# Altium PCB PCB1.PcbDoc
Units mil, origin at the board's own origin, x right, y up, seen from the top; angles counter-clockwise.
Board outline 5000 x 1000 mil, 2 copper layers (Top Layer, Bottom Layer), stack 25.4 mil thick; 53 components, 42 nets, 176 pads, 21 vias.
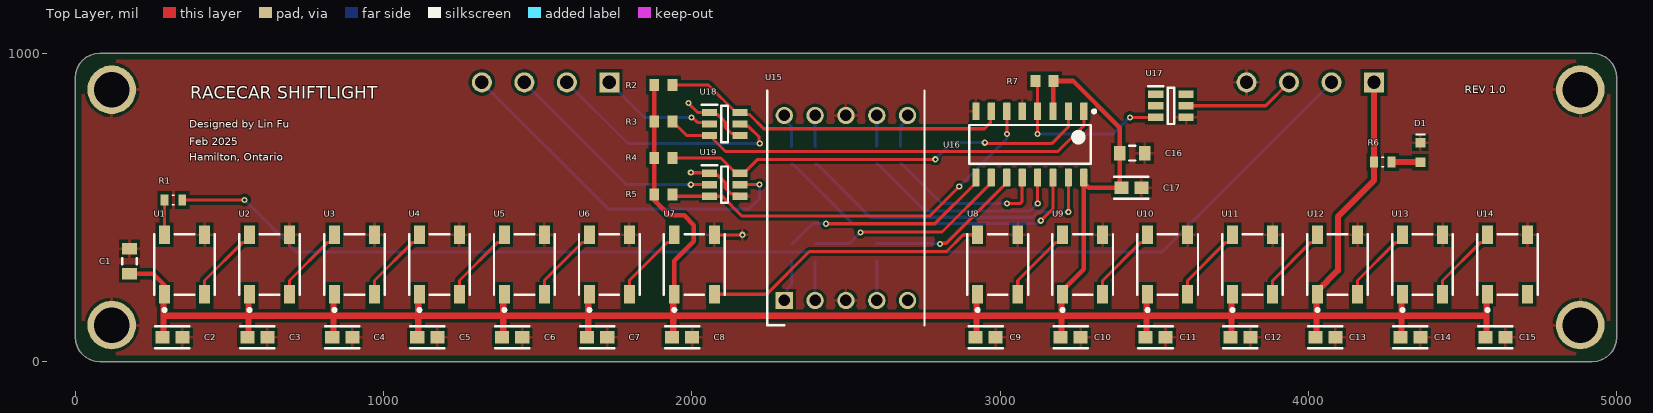
[diagram p0: Top Layer view]
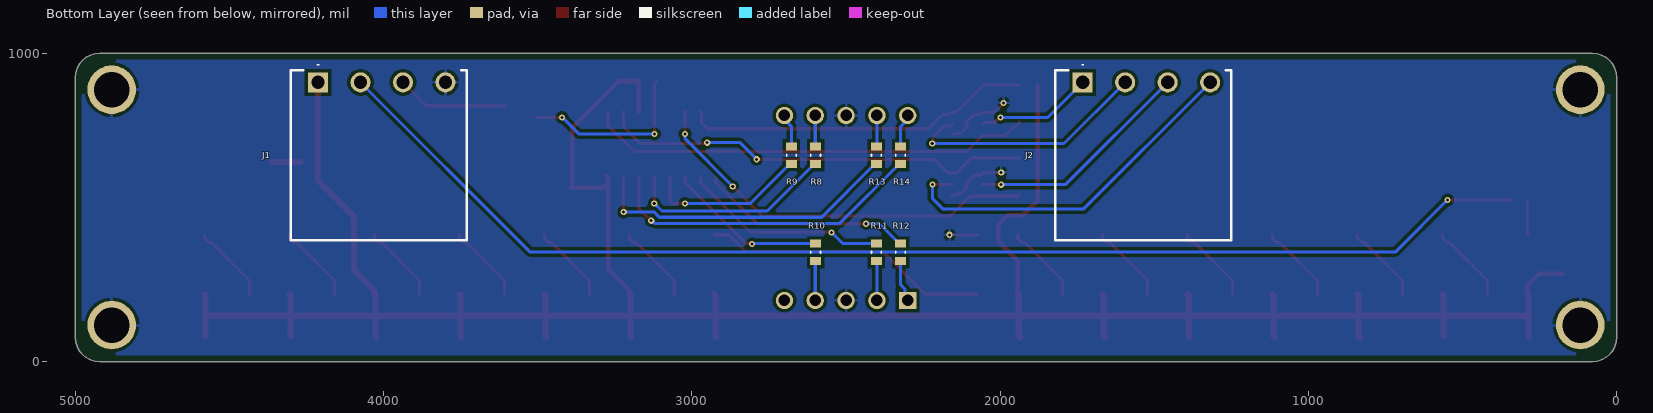
[diagram p1: Bottom Layer view, seen from below]
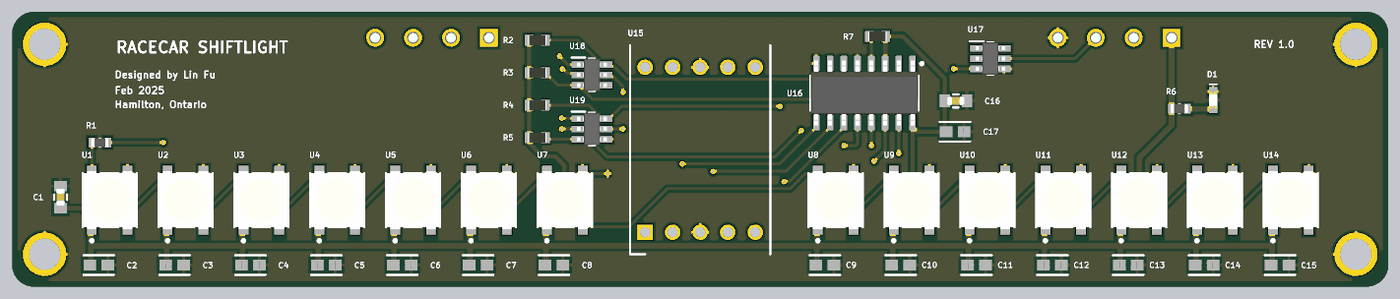
[diagram p2: 3D render of the assembled board from above, using the file's embedded part models]
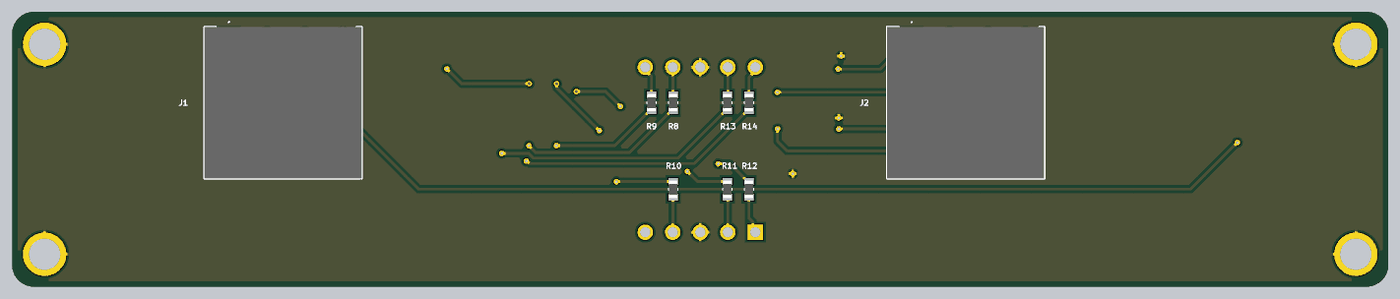
[diagram p3: 3D render of the assembled board from below, using the file's embedded part models]

## Layer stack, top to bottom
Top Solder: solder mask 0.4, Solder Resist, Dk 3.5
Top Layer: signal copper 1.4
Dielectric 1: dielectric 22.6, FR-4, Dk 4.8
Bottom Layer: signal copper 1.4
Bottom Solder: solder mask 0.4, Solder Resist, Dk 3.5

## Board outline
0,78.74 1.51,63.38 5.99,48.61 13.27,34.99 23.06,23.06 34.99,13.27 48.61,5.99 63.38,1.51 78.74,0 4921.26,0 4936.62,1.51 4951.39,5.99 4965.01,13.27 4976.94,23.06 4986.73,34.99 4994.01,48.61 4998.49,63.38 5000,78.74 5000,921.26 4998.49,936.62 4994.01,951.39 4986.73,965.01 4976.94,976.94 4965.01,986.73 4951.39,994.01 4936.62,998.49 4921.26,1000 78.74,1000 63.38,998.49 48.61,994.01 34.99,986.73 23.06,976.94 13.27,965.01 5.99,951.39 1.51,936.62 0,921.26

## Design rules (kind name [scope] priority, off if disabled: settings)
BoardOutlineClearance [All] p1: gap=20 ignorepadtopadclearanceinfootprint=FALSE except(0: Arc-SplitContinuation Track-SplitContinuation SMDPad-SplitContinuation THPad-SplitContinuation Via-SplitContinuation Fill-SplitContinuation Poly-SplitContinuation Region-SplitContinuation Text-SplitContinuation)
Clearance [All] p1: gap=10 ignorepadtopadclearanceinfootprint=FALSE
MinimumSolderMaskSliver [All] p1: minsoldermaskwidth=5
PolygonConnect [All] p1: connectstyle=Relief reliefconductorwidth=10 reliefentries=4 polygonreliefangle="90 Angle" airgapwidth=10
RoutingVias [All] p1: holewidth=10 width=20 viastyle="Through Hole" minholewidth=10 minwidth=20 maxholewidth=28 maxwidth=50
SilkToSolderMaskClearance [IsPad] p1: minsilkscreentomaskgap=5 clearancetoexposedcopper=TRUE
SolderMaskExpansion [All] p1: expansion=4 istentingtop=FALSE
SupplyNets "Schematic Supply Nets_1" [InNet('5V')] p1: voltage=0.000
SupplyNets "Schematic Supply Nets_2" [InNet('GND')] p2: voltage=0.000
Width [All] p1: maxlimit=20 minlimit=10 preferedwidth=10
28 further rules are at their usual default settings.

## Classes and differential pairs
component class ws2812b: C1 C2 C3 C4 C5 C6 C7 C8 C9 C10 C11 C12 C13 C14 C15 R1 U1 U2 U4 U5 U6 U7 U8 U9 U10 U11 U12 U13 U14
component class connectors_and_mosfets: J2 U17 U18 U19
component class 7_seg_display: C16 C17 D1 R2 R3 R4 R5 R6 R7 R8 R9 R10 R11 R12 R13 R14 U15 U16

## Components (designator, comment, footprint, x,y, rotation, side; value= is the part's Value field where it differs from the comment)
C1 "1uF" FP-CGA3E-0_3-0_1-IPC_A 175.9,325.74 r90 top
C2 "100nF" FP-CL10-IPC_A 314.96,78.74 r0 top
C3 "100nF" FP-CL10-IPC_A 590.55,78.74 r0 top
C4 "100nF" FP-CL10-IPC_A 866.14,78.74 r0 top
C5 "100nF" FP-CL10-IPC_A 1141.73,78.74 r0 top
C6 "100nF" FP-CL10-IPC_A 1417.32,78.74 r0 top
C7 "100nF" FP-CL10-IPC_A 1692.91,78.74 r0 top
C8 "100nF" FP-CL10-IPC_A 1968.5,78.74 r0 top
C9 "100nF" FP-CL10-IPC_A 2952.76,78.74 r0 top
C10 "100nF" FP-CL10-IPC_A 3228.35,78.74 r0 top
C11 "100nF" FP-CL10-IPC_A 3503.94,78.74 r0 top
C12 "100nF" FP-CL10-IPC_A 3779.53,78.74 r0 top
C13 "100nF" FP-CL10-IPC_A 4055.12,78.74 r0 top
C14 "100nF" FP-CL10-IPC_A 4330.71,78.74 r0 top
C15 "100nF" FP-CL10-IPC_A 4606.3,78.74 r0 top
C16 "1uF" FP-CGA3E-0_3-0_1-IPC_A 3428.49,675.9 r0 top
C17 "100nF" FP-CL10-IPC_A 3425.82,563.85 r0 top
D1 "150060VS75000" WL-SMCW_0603_150060xx75000 4363.32,678.49 r270 top
J1 "284414-4" 2844144 4212.6,905.51 r180 bottom
J2 "284414-4" 2844144 1732.28,905.51 r180 bottom
R1 "ERJ-PB3B3300V" RES_ERJ-PB3B3300V 318.45,524.23 r0 top value=330
R2 "Resistor 10k +/-1% 0603 100 mW" RESC1608X55X25ML10T15 1907.93,896.76 r180 top value=10k
R3 "Resistor 10k +/-1% 0603 100 mW" RESC1608X55X25ML10T15 1907.93,778.65 r180 top value=10k
R4 "Resistor 10k +/-1% 0603 100 mW" RESC1608X55X25ML10T15 1907.93,660.54 r180 top value=10k
R5 "Resistor 10k +/-1% 0603 100 mW" RESC1608X55X25ML10T15 1907.93,542.43 r180 top value=10k
R6 "ERJ-PB3B3300V" RES_ERJ-PB3B3300V 4240.84,647.39 r180 top value=330
R7 "Resistor 10k +/-1% 0603 100 mW" RESC1608X55X25ML10T15 3143.88,909.98 r0 top value=10k
R8 "ERJ-PB3B3300V" RES_ERJ-PB3B3300V 2598.43,669.29 r270 bottom value=330
R9 "ERJ-PB3B3300V" RES_ERJ-PB3B3300V 2677.17,669.29 r270 bottom value=330
R10 "ERJ-PB3B3300V" RES_ERJ-PB3B3300V 2598.43,354.33 r90 bottom value=330
R11 "ERJ-PB3B3300V" RES_ERJ-PB3B3300V 2401.57,354.33 r90 bottom value=330
R12 "ERJ-PB3B3300V" RES_ERJ-PB3B3300V 2322.83,354.33 r90 bottom value=330
R13 "ERJ-PB3B3300V" RES_ERJ-PB3B3300V 2401.57,669.29 r270 bottom value=330
R14 "ERJ-PB3B3300V" RES_ERJ-PB3B3300V 2322.83,669.29 r90 bottom value=330
U1 "WS2812B" ADAI-WS2812B_V 354.33,314.96 r90 top
U2 "WS2812B" ADAI-WS2812B_V 629.92,314.96 r90 top
U3 "WS2812B" ADAI-WS2812B_V 905.51,314.96 r90 top
U4 "WS2812B" ADAI-WS2812B_V 1181.1,314.96 r90 top
U5 "WS2812B" ADAI-WS2812B_V 1456.69,314.96 r90 top
U6 "WS2812B" ADAI-WS2812B_V 1732.28,314.96 r90 top
U7 "WS2812B" ADAI-WS2812B_V 2007.87,314.96 r90 top
U8 "WS2812B" ADAI-WS2812B_V 2992.13,314.96 r90 top
U9 "WS2812B" ADAI-WS2812B_V 3267.72,314.96 r90 top
U10 "WS2812B" ADAI-WS2812B_V 3543.31,314.96 r90 top
U11 "WS2812B" ADAI-WS2812B_V 3818.9,314.96 r90 top
U12 "WS2812B" ADAI-WS2812B_V 4094.49,314.96 r90 top
U13 "WS2812B" ADAI-WS2812B_V 4370.08,314.96 r90 top
U14 "WS2812B" ADAI-WS2812B_V 4645.67,314.96 r90 top
U15 "SC56-11SURKWA" DIPS1524W75P254L1270H825Q10N 2299.78,198.28 r90 top
U16 "CD74HC4511M96" D0016A_N 3096.46,704.33 r270 top
U17 "SZNUD3124DMT1G" SOT95P275X110-6N 3554.12,829.74 r0 top
U18 "SZNUD3124DMT1G" SOT95P275X110-6N 2106.51,770.54 r0 top
U19 "SZNUD3124DMT1G" SOT95P275X110-6N 2106.51,573.69 r0 top

## Footprints (in the part's own frame and the unit in brackets; to place one, negate y for a bottom-side part, rotate by r counter-clockwise, add the part's x,y. Pads: shape width x height; smd on the part's side, far side on the other; paste and mask are expansions set on the pad)
2844144 [mm]
  rect 1.65x1.65 hole 1.1: 1(0,0)
  round 1.65 hole 1.1: 2(3.5,0) 3(7,0) 4(10.5,0)
  silkscreen extent -2.25,-13 12.25,1.5, body extent -2.25,-13 12.25,1, height 8.45
ADAI-WS2812B_V [mm] "SMD, 4-Leads, Body 5x5mm, Pitch 3.3mm"
  rect 1.5x0.9 smd: 1(-2.45,1.65) 2(-2.45,-1.65) 3(2.45,-1.65) 4(2.45,1.65)
  silkscreen extent -3.87,-2.5 2.5,2.5, body extent -2.7,-2.5 2.7,2.5, height 1.69
D0016A_N [mm] "SOIC, 16-Leads, Body 10x4mm, Pitch 1.27mm, IPC Medium Density"
  rrect17% 1.45x0.6 smd: 1(-2.725,4.445) 2(-2.725,3.175) 3(-2.725,1.905) 4(-2.725,0.635) 5(-2.725,-0.635) 6(-2.725,-1.905) 7(-2.725,-3.175) 8(-2.725,-4.445) 9(2.725,-4.445) 10(2.725,-3.175) 11(2.725,-1.905) 12(2.725,-0.635) 13(2.725,0.635) 14(2.725,1.905) 15(2.725,3.175) 16(2.725,4.445)
  silkscreen extent -2.85,-5 1.6,5.42, body extent -3,-4.95 3,4.95, height 1.59
DIPS1524W75P254L1270H825Q10N [mm]
  rect 1.425x1.425 hole 0.95: 1(0,0)
  round 1.425 hole 0.95: 2(0,-2.54) 3(0,-5.08) 4(0,-7.62) 5(0,-10.16) 6(15.24,-10.16) 7(15.24,-7.62) 8(15.24,-5.08) 9(15.24,-2.54) 10(15.24,0)
  silkscreen extent -2.03,-11.56 17.27,1.4
FP-CGA3E-0_3-0_1-IPC_A [mm]
  rect 0.956x1.206 smd paste+0 mask+0: 1(-1.025,0) 2(1.025,0)
  silkscreen extent -0.25,-0.6 0.25,0.6, body extent -2,-1.1 2,1.1, height 0.25
FP-CL10-IPC_A [mil]
  rect 45.6x39.85 smd paste+0 mask+0: 1(-32.56,0) 2(32.56,0)
  silkscreen extent -55,-36 55,36, body extent -75,-40 75,40, height 10
RES_ERJ-PB3B3300V [mm]
  rect 0.65x0.9 smd: 1(-0.725,0) 2(0.725,0)
  silkscreen extent -0.08,-0.4 0.08,0.4, body extent -0.8,-0.4 0.8,0.4, height 0.45
RESC1608X55X25ML10T15 [mm] "Chip Resistor, 2-Leads, Body 1.70x0.90mm, IPC Low Density"
  rect 0.8x1 smd: 1(-0.75,0) 2(0.75,0)
  body extent -0.85,-0.45 0.85,0.45, height 0.55
SOT95P275X110-6N [mm]
  rect 1.25x0.6 smd: 1(-1.25,0.95) 2(-1.25,0) 3(-1.25,-0.95) 4(1.25,-0.95) 5(1.25,0) 6(1.25,0.95)
  silkscreen extent -1.88,-1.5 0.28,1.6, body extent -1.38,-1.5 1.38,1.5, height 1.1
WL-SMCW_0603_150060xx75000 [mm] "SMD Mono-color Chip LED, body 1.60 x 0.80 mm"
  rect 0.8x0.8 smd: 1(-0.8,0) 2(0.8,0)
  silkscreen extent -1.55,-0.4 -1.4,0.4, body extent -0.8,-0.4 0.8,0.4, height 0.7

## Part data
C1 C16: library part CMP-08246-002161-1, "Cap Ceramic 1uF 16V X7R 10% Pad SMD 0603 +125°C Automotive T/R", Case Code (Imperial)=0603, Case Code (Metric)=1608, Dielectric=X7R, Max Operating Temperature=125°C, Min Operating Temperature=-55°C, Package Quantity=4000, Ratings=AEC-Q200, Tolerance=10%, Voltage Rating=16V, Capacitance=1uF, Case/Package=0603, Height=0.8mm, Lead Free="Lead Free", Length=0.063inch, Mount="Surface Mount", Packaging="Tape and Reel", REACH SVHC="No SVHC", Termination=SMD/SMT, Thickness=0.035inch, Voltage Rating (DC)=16V, Weight=7.1E-05oz, Width=0.8mm
C2 C3 C4 C5 C6 C7 C8 C9 C10 C11 C12 C13 C14 C15 C17: library part CMP-13271-002683-1, "Cap Ceramic 100nF 16V X7R ±10% Pad SMD 0603 +125°C T/R", Case Code (Imperial)=0603, Case Code (Metric)=1608, Max Operating Temperature=125°C, Min Operating Temperature=-55°C, Ratings=AEC-Q200, Tolerance=10%, Voltage Rating=16V, Capacitance=100nF, Case/Package=0603, Features="Soft Termination", Length=0.063inch, Mount="Surface Mount", Packaging="Tape and Reel", Thickness=0.035inch, Width=0.031inch
D1: library part CMP-1426-00006-7, "WURTH ELEKTRONIK - 150060VS75000 - LED, Green, SMD, 0603, 30 mA, 2 V, 570 nm", Case Code (Imperial)=0603, Case Code (Metric)=1608, Color=Green, Forward Current=100mA, Forward Voltage=2V, Max Junction Temperature (Tj)=95°C, Max Operating Temperature=85°C, Max Reverse Voltage (DC)=5V, Min Operating Temperature=-40°C, Power Dissipation=72mW, Test Current=20mA, Case/Package=0603, Dominant Wavelength=570nm, Height=700µm, Length=1.6mm, Lens Style="Clear, Rectangular", Luminous Intensity=40mcd, Mount="Surface Mount", Number of Pins=2, Packaging="Tape and Reel", Peak Wavelength=572nm, REACH SVHC=Unknown, Reverse Voltage=5V, RoHS=Compliant, Viewing Angle=140°, Wavelength=570nm, Width=800µm
J1 J2: "Connector", Manufacturer_Name="TE Connectivity", Mouser Part Number=571-284414-4, Datasheet Link=https://www.te.com/commerce/DocumentDelivery/DDEController?Action=srchrtrv&DocNm=1-1773458-1_EURO_STYLE_QRG&DocType=Data%20Sheet&DocLang=English&PartCntxt=284414-4&DocFormat=pdf, Height=8.35mm, Manufacturer_Part_Number=284414-4, Mouser Price/Stock=https://www.mouser.co.uk/ProductDetail/TE-Connectivity-AMP/284414-4?qs=pW%2FyRk%2FT1EFQM4dD%252BIL6sA%3D%3D
  J1: ComponentLink1Description=digikey, ComponentLink1URL=https://www.digikey.ca/en/products/detail/te-connectivity-amp-connectors/284414-4/1150171
R1 R6 R8 R9 R10 R11 R12 R13 R14: library part CMP-009-00177-1, "Series/Type: High Precision Thick Film Chip Resistors , Power Rating (W): 0.2, Chip Size (LxW(EIA)) (mm): 1.6 x 0.8 (EIA:0603), Resistance Values (鈩", Case/Package="603-2 Panasonic", Availability="In Stock", Check_prices=https://www.snapeda.com/parts/ERJ-PB3B3300V/Panasonic/view-part/?ref=eda, Component Type=Standard, Design Item ID=ERJ-PB3B3300V, MF=Panasonic, MP=ERJ-PB3B3300V, Pins=2, Price=None, Purchase-URL=https://pricing.snapeda.com/search/part/ERJ-PB3B3300V/?ref=eda, SnapEDA_Link=https://www.snapeda.com/parts/ERJ-PB3B3300V/Panasonic/view-part/?ref=snap, Source=ERJ-PB3B3300V.SchLib
  R8: ComponentLink1Description=Digikey, ComponentLink1URL=https://www.digikey.ca/en/products/detail/panasonic-electronic-components/ERJ-PB3B3300V/6212698
R2 R3 R4 R5 R7: library part CMP-009-00017-5, "Chip Resistor, 10 KOhm, +/- 1%, 01 W, -55 to 155 degC, 0603 (1608 Metric)", Case/Package=0603, Max Operating Temperature=155°C, Min Operating Temperature=-55°C, Power=100mW, Tolerance=1%, Voltage Rating=50V, Mounting Technology=SM, Pins=2, RoHS Compliant=True
U1 U2 U3 U4 U5 U6 U7 U8 U9 U10 U11 U12 U13 U14: library part CMP-007-00035-2, "Intelligent Control LED Integrated Light Source, 3.5 to 5.3 V, -25 to 80 degC, 4-Pin SMD, RoHS, Bulk", Manufacturer="Adafruit Industries", Package Description="4-Pin Surface Mount Device, Body 5 x 5 mm, Pitch 3.3 mm", Case/Package=WS2812B, Datasheet URL=https://cdn-shop.adafruit.com/datasheets/WS2812B.pdf, Datasheet Version=May-13, Manufacturer URL=https://www.adafruit.com/, Mounting Technology=SM, Package Reference=WS2812B, RoHS Compliant=False
U15: "Display", Manufacturer_Name=Kingbright, Mouser Part Number=604-SC56-11SURKWA, Arrow Part Number=SC56-11SURKWA, Arrow Price/Stock=https://www.arrow.com/en/products/sc56-11surkwa/kingbright?region=europe, Datasheet Link=https://www.kingbrightusa.com/images/catalog/SPEC/SC56-11SURKWA.pdf, Height=8.25mm, Manufacturer_Part_Number=SC56-11SURKWA, Mouser Price/Stock=https://www.mouser.co.uk/ProductDetail/Kingbright/SC56-11SURKWA?qs=FRBiz4Wv1YPfPJAshkDmnw%3D%3D
U16: library part CMP-0388-00023-2, "High Speed CMOS Logic BCD-to-7-Segment Latch / Decoder / Driver, 2 to 6 V, -55 to 125 degC, 16-pin SOIC (D16), Green (RoHS & no Sb/Br)", Manufacturer="Texas Instruments", Rating=Catalog, Code_JEDEC=MS-012, ComponentLink1Description="Manufacturer URL", ComponentLink1URL=http://www.ti.com/, ComponentLink2Description=Datasheet, ComponentLink2URL=http://www.ti.com/general/docs/lit/getliterature.tsp?genericPartNumber=CD74HC4511&fileType=pdf, ComponentLink3Description="Package Specification", ComponentLink3URL=http://www.ti.com/litv/pdf/mpds178g, DatasheetVersion=SCHS279D, Eco-Plan="Green (RoHS & no Sb/Br)", Mounting Technology="Surface Mount", PackageDescription="16-Pin Plastic Small Outline, Body 9.90 x 3.90 mm, Pitch 1.27 mm", PackageReference=D0016A, PackageVersion=4040047-6/M, PartNumber=CD74HC4511M96, SubFamily="Discrete Segment LED Driver", Vin(Max)(V)=6, Vin(Min)(V)=2
U17 U18 U19: "Integrated Circuit", Manufacturer_Name=onsemi, Mouser Part Number=863-SZNUD3124DMT1G, Arrow Part Number=SZNUD3124DMT1G, Arrow Price/Stock=https://www.arrow.com/en/products/sznud3124dmt1g/on-semiconductor?region=nac, Datasheet Link=https://componentsearchengine.com/Datasheets/2/SZNUD3124DMT1G.pdf, Height=1.1mm, Manufacturer_Part_Number=SZNUD3124DMT1G, Mouser Price/Stock=https://www.mouser.co.uk/ProductDetail/onsemi/SZNUD3124DMT1G?qs=uarJZ6H%252BeNp%2Fh61aNCid3w%3D%3D

## Free pads (board coordinates)
  round 157.48 hole 114.17: 1(118.11,118.11) 1(118.11,881.89) 1(4881.89,118.11) 1(4881.89,881.89)

## Via types
v1: diameter 20, hole 10, Top Layer to Bottom Layer, 21 vias

## Nets (pads, with @x,y where several pads share a name; then routed paths per layer and width w, separated by ;. In a path a pad name is that pad's centre, name@x,y a point inside that pad or via, vN(x,y) a via of type N, cw(c..) or ccw(c..) an arc to the next point about the centre after c; other vN are vias at no path point)
5V: C1.1 C2.1 C3.1 C4.1 C5.1 C6.1 C7.1 C8.1 C9.1 C10.1 C11.1 C12.1 C13.1 C14.1 C15.1 C16.1 C17.1 J1.1 R2.2 R3.2 R4.2 R5.2 R6.2 R7.2 U1.1 U2.1 U3.1 U4.1 U5.1 U6.1 U7.1 U8.1 U9.1 U10.1 U11.1 U12.1 U13.1 U14.1 U16.3 U16.16 | length 9133.1
  Top Layer w15: C1.1 252.02,285.39 289.37,248.03 U1.1 ; C2.1 285.89,82.22 C2.1@289.37,85.71 ; C3.1@560.87,78.74 C3.1 561.48,82.22 C3.1@564.96,85.71 ; U2.1@564.96,206.69 U2.1 ; R2.2 1878.4,895.97 R3.2 R4.2 R5.2 1878.4,522.75 1927.02,474.13 1974.79,474.13 2006.16,442.76 2006.16,390 1942.91,326.75 U7.1 ; U16.3 3172.43,812.59 3172.43,909 R7.2 3237.02,909.98 3388.14,758.86 C16.1 3388.14,568.98 C17.1 3287.92,563.85 U16.16@3271.46,580.32 ; U9.1@3203.25,230.81 3271.46,299.02 U16.16@3271.46,580.32 ; U16.16@3275.77,602.14 3271.46,597.83 U16.16 U16.16@3271.46,580.32 ; C14.1 4301.63,82.22 C14.1@4305.12,85.71 ; C15.1 4577.22,82.22 C15.1@4580.71,85.71
  Top Layer w20: C2.1@285.89,82.22 285.89,148.62 ; U1.1 285.89,215.02 285.89,148.62 ; C3.1@561.48,82.22 561.48,148.62 ; U2.1 561.48,215.02 561.48,148.62 ; C4.1 837.07,82.22 837.07,148.62 ; U3.1 837.07,215.02 837.07,148.62 ; C5.1 1112.66,82.22 1112.66,148.62 ; U4.1 1112.66,215.02 1112.66,148.62 ; C6.1 1388.25,82.22 1388.25,148.62 ; U5.1 1388.25,215.02 1388.25,148.62 ; C7.1 1663.84,82.22 1663.84,148.62 ; U6.1 1663.84,215.02 1663.84,148.62 ; C8.1 1939.43,82.22 1939.43,148.62 ; U7.1 1939.43,215.02 1939.43,148.62 ; C9.1 2923.68,82.22 2923.68,148.62 ; U8.1 2923.68,215.02 2923.68,148.62 ; C10.1 3199.27,82.22 3199.27,148.62 ; U9.1 3199.27,215.02 3199.27,148.62 ; C11.1 3474.86,82.22 3474.86,148.62 ; U10.1 3474.86,215.02 3474.86,148.62 ; C12.1 3750.45,82.22 3750.45,148.62 ; U11.1 3750.45,215.02 3750.45,148.62 ; C13.1 4026.04,82.22 4026.04,148.62 ; J1.1 4212.3,905.21 R6.2 4212.3,587.33 4095.42,470.45 4095.42,296.2 4029.53,230.31 U12.1 4026.04,215.02 4026.04,148.62 ; C14.1@4301.63,82.22 4301.63,148.62 ; U13.1 4301.63,215.02 4301.63,148.62 ; C15.1@4577.22,82.22 4577.22,148.62 ; U14.1 4577.22,215.02 4577.22,148.62 ; 285.89,148.62 561.48,148.62 ; 561.48,148.62 837.07,148.62 ; 837.07,148.62 1112.66,148.62 ; 1112.66,148.62 1388.25,148.62 ; 1388.25,148.62 1663.84,148.62 ; 1663.84,148.62 1939.43,148.62 ; 1939.43,148.62 2923.68,148.62 ; 2923.68,148.62 3199.27,148.62 ; 3199.27,148.62 3474.86,148.62 ; 3474.86,148.62 3750.45,148.62 ; 3750.45,148.62 4026.04,148.62 ; 4026.04,148.62 4301.63,148.62 ; 4301.63,148.62 4577.22,148.62
7_SEG_BRIGHTNESS_PWM: J1.3 U17.5 | length 365.1
  Top Layer w10: U17.5 3861.24,829.74 J1.3
a_out: R8.2 U16.13 | length 679
  Top Layer w10: U16.13 3121.72,596.78 3121.72,515.66 v1@3121.99,515.39
  Bottom Layer w10: R8.2 2603.35,640.75 2755.93,488.16 3096.99,488.16 v1(3121.99,513.16)
b_out: R9.2 U16.12 | length 527.5
  Top Layer w10: v1(3022.31,513.16) 3065.47,513.16 3071.46,519.15 U16.12
  Bottom Layer w10: R9.2 2682.09,640.75 2809.67,513.16 v1(3022.31,513.16)
BL_n: R7.1 U16.4 U17.3 | length 580
  Top Layer w10: R7.1 3121.46,902.87 U16.4 ; v1(3121.5,738.64) U16.4 ; v1(3420.88,792.13) 3420.98,792.24 3504.8,792.24 U17.3
  Bottom Layer w10: v1(3121.5,738.64) 3367.39,738.64 v1(3420.88,792.13)
c_out: R10.2 U16.11 | length 522.4
  Top Layer w10: v1(2804.4,381.81) 2806.31,383.72 2824.86,383.72 3021.46,580.32 U16.11
  Bottom Layer w10: R10.2 2598.96,382.34 2803.86,382.34 v1(2804.4,381.81)
D0_IN: J2.1 U18.2 | length 380.9
  Top Layer w10: v1(1998.94,791.84) 2001.65,791.84 2017.69,775.8 2052.03,775.8 U18.2
  Bottom Layer w10: J2.1 1845.95,791.84 v1(1998.94,791.84)
D1_IN: J2.2 U18.5 | length 809.8
  Top Layer w10: U18.5 2162.53,763.73 2182.76,763.73 2218.29,728.2 2218.29,709.1 v1(2220.2,707.19)
  Bottom Layer w10: J2.2 1792.81,707.19 v1(2220.2,707.19)
D2_IN: J2.3 U19.2 | length 742.9
  Top Layer w10: v1@1997.18,573.78 1997.23,573.74 2057.25,573.74 U19.2 U19.2@2053.86,577.12
  Bottom Layer w10: J2.3 1788.42,573.78 v1@1997.18,573.78
  other v1: 1996.57,573.78
D3_IN: J2.4 U19.5 | length 1193.4
  Top Layer w10: U19.5 2155.89,573.85 2218.73,573.85 v1@2218.9,574.02
  Bottom Layer w10: J2.4 1730.14,494.27 2184.72,494.27 2219.04,528.59 v1(2219.04,574.02)
d_out: R11.2 U16.10 | length 668.4
  Top Layer w10: v1(2546.66,418.84) 2547.92,420.1 2811.24,420.1 2971.46,580.32 U16.10
  Bottom Layer w10: R11.2 2510.69,382.87 v1(2546.66,418.84)
DIN: J1.2 R1.2 | length 4026.1
  Top Layer w10: R1.2 347.3,524.55 v1(548.83,524.55)
  Bottom Layer w10: v1(548.83,524.55) 718.3,355.08 3524.37,355.08 J1.2
DOUT_U7: U7.2 U8.4 | length 934.2
  Top Layer w10: U7.2 2242.69,218.5 2380.99,356.81 2826.23,356.81 2880.84,411.42 U8.4
e_out: R12.2 U16.9 | length 697.6
  Top Layer w10: v1(2434.8,447.06) 2788.2,447.06 2921.46,580.32 U16.9
  Bottom Layer w10: R12.2 2327.76,382.87 2392.55,447.66 2434.19,447.66 v1(2434.8,447.06)
f_out: R13.2 U16.15 | length 1010.2
  Top Layer w10: v1(3221.19,485) 3221.32,485.13 3221.32,596.92 U16.15
  Bottom Layer w10: R13.2 2406.5,640.75 2579.08,468.16 3105.27,468.16 3122.11,485 v1(3221.19,485)
g_out: R14.1 U16.14 | length 1049.2
  Top Layer w10: v1(3131.98,456.99) 3171.74,496.75 3171.74,596.77 U16.14
  Bottom Layer w10: R14.1 2327.76,640.75 2520.34,448.16 3120.45,448.16 3129.28,456.99 v1(3131.98,456.99)
GND: C1.2 C2.2 C3.2 C4.2 C5.2 C6.2 C7.2 C8.2 C9.2 C10.2 C11.2 C12.2 C13.2 C14.2 C15.2 C16.2 C17.2 D1.1 J1.4 pad.1 U1.3 U2.3 U3.3 U4.3 U5.3 U6.3 U7.3 U8.3 U9.3 U10.3 U11.3 U12.3 U13.3 U14.3 U15.3 U15.8 U16.5 U16.8 U17.4 U18.1 U18.4 U19.1 U19.4 | length 513.5
  Top Layer w10: v1(1988.59,839.1) 1988.59,838.39 2019.03,807.94 U18.1 2064.1,801.13 2084.33,801.13 2108.4,777.06 2108.4,760.23 2128.68,739.95 2148.91,739.95 U18.4 ; v1(1996.57,613.63) 1997.84,612.36 2056.02,612.36 2064.1,604.28 2084.33,604.28 2108.4,580.21 2108.4,563.38 2128.68,543.1 2148.91,543.1 U19.4 ; U7.3 2073.09,411.16 v1(2163.89,411.16)
NetD1_2: D1.2 R6.1 | length 94.1
  Top Layer w15: R6.1 R6.1@4269.58,647.19 ; D1.2@4363.13,647.19 D1.2
  Top Layer w20: R6.1@4269.58,647.19 D1.2@4363.13,647.19
NetR1_1: R1.1 U1.4 | length 124.8
  Top Layer w10: U1.4@289.37,423.23 U1.4 289.9,411.95 R1.1
NetR2_1: R2.1 U16.7 U18.6 | length 1132.2
  Top Layer w10: R2.1 2054.1,896.76 2142.92,807.94 U18.6 ; U18.6@2159.4,807.94 2165.91,801.43 2186.84,801.43 2233.04,755.23 2949.09,755.23 2968.27,774.41 2968.27,808.43 U16.7
NetR3_1: R3.1 U16.1 U18.3 | length 1457.7
  Top Layer w10: R3.1 1937.46,774.72 1948.21,763.97 1952.14,763.97 1982.98,733.13 U18.3 2109.16,681.27 3187.39,681.27 3271.46,765.34 U16.1
NetR4_1: R4.1 U16.2 U19.6 | length 1419.5
  Top Layer w10: R4.1 2093.47,660.54 2142.92,611.09 2168.51,611.09 2213.56,656.14 v1(2789.65,656.14) ; v1(2950.31,709.96) 2953.01,709.96 2956.01,706.96 3167.1,706.96 3221.46,761.32 U16.2
  Bottom Layer w10: v1(2789.65,656.14) 2843.47,709.96 v1(2950.31,709.96)
NetR5_1: R5.1 U16.6 U19.3 | length 1306.8
  Top Layer w10: R5.1 1943.61,536.28 U19.3 2098.09,536.28 2162.06,472.31 2771.68,472.31 v1(2867.48,568.11) ; U16.6@3021.09,811.25 U16.6 3021.6,811.47 3021.6,738.79 v1(3021.74,738.64)
  Bottom Layer w10: v1(2867.48,568.11) 3021.74,722.37 v1(3021.74,738.64)
NetU1_2: U1.2 U2.4 | length 258.6
  Top Layer w10: U1.2 419.29,263.03 543.15,386.89 552.24,386.89 564.96,399.61 U2.4
NetU2_2: U2.2 U3.4 | length 258.6
  Top Layer w10: U2.2 694.88,263.03 818.74,386.89 827.83,386.89 840.55,399.61 U3.4
NetU3_2: U3.2 U4.4 | length 258.6
  Top Layer w10: U3.2 970.47,263.03 1094.33,386.89 1103.43,386.89 1116.14,399.61 U4.4
NetU4_2: U4.2 U5.4 | length 258.6
  Top Layer w10: U4.2 1246.06,263.03 1369.92,386.89 1379.02,386.89 1391.73,399.61 U5.4
NetU5_2: U5.2 U6.4 | length 258.6
  Top Layer w10: U5.2 1521.65,263.03 1645.51,386.89 1654.61,386.89 1667.32,399.61 U6.4
NetU6_2: U6.2 U7.4 | length 258.6
  Top Layer w10: U6.2 1797.24,263.03 1921.1,386.89 1930.2,386.89 1942.91,399.61 U7.4
NetU8_2: U8.2 U9.4 | length 258.6
  Top Layer w10: U8.2 3057.09,263.03 3180.94,386.89 3190.04,386.89 3202.76,399.61 U9.4
NetU9_2: U9.2 U10.4 | length 258.6
  Top Layer w10: U9.2 3332.68,263.03 3456.54,386.89 3465.63,386.89 3478.35,399.61 U10.4
NetU10_2: U10.2 U11.4 | length 258.6
  Top Layer w10: U10.2 3608.27,263.03 3732.13,386.89 3741.22,386.89 3753.94,399.61 U11.4
NetU11_2: U11.2 U12.4 | length 258.6
  Top Layer w10: U11.2 3883.86,263.03 4007.72,386.89 4016.81,386.89 4029.53,399.61 U12.4
NetU12_2: U12.2 U13.4 | length 258.6
  Top Layer w10: U12.2 4159.45,263.03 4283.31,386.89 4292.4,386.89 4305.12,399.61 U13.4
NetU13_2: U13.2 U14.4 | length 258.6
  Top Layer w10: U13.2 4435.04,263.03 4558.9,386.89 4567.99,386.89 4580.71,399.61 U14.4
SEG_A: R8.1 U15.7 | length 101
  Bottom Layer w10: R8.1 2599.78,699.19 U15.7
SEG_B: R9.1 U15.6 | length 109.8
  Bottom Layer w10: R9.1 2677.17,763.19 2699.78,785.8 U15.6
SEG_C: R10.1 U15.4 | length 128.1
  Bottom Layer w10: R10.1 2599.78,324.43 U15.4
SEG_D: R11.1 U15.2 | length 128.3
  Bottom Layer w10: U15.2 2399.78,323.99 R11.1
SEG_E: R12.1 U15.1 | length 137.1
  Bottom Layer w10: U15.1 2308.92,207.42 2308.92,235.47 2322.83,249.38 R12.1
SEG_F: R13.1 U15.9 | length 101.2
  Bottom Layer w10: U15.9 2399.78,699.63 R13.1
SEG_G: R14.2 U15.10 | length 110
  Bottom Layer w10: U15.10 2299.78,785.8 2322.83,762.74 R14.2
pads on no net: U14.2 U15.5 U17.1 U17.2 U17.6

## Polygon pours and split planes (outlines as drawn)
GND on Top Layer "GND_TOP" (solid, remove dead copper, pour order 0): 0,78.74 1.51,63.38 5.99,48.61 13.27,34.99 23.06,23.06 34.99,13.27 48.61,5.99 63.38,1.51 78.74,0 4921.26,0 4936.62,1.51 4951.39,5.99 4965.01,13.27 4976.94,23.06 4986.73,34.99 4994.01,48.61 4998.49,63.38 5000,78.74 5000,921.26 4998.49,936.62 4994.01,951.39 4986.73,965.01 4976.94,976.94 4965.01,986.73 4951.39,994.01 4936.62,998.49 4921.26,1000 78.74,1000 63.38,998.49 48.61,994.01 34.99,986.73 23.06,976.94 13.27,965.01 5.99,951.39 1.51,936.62 0,921.26
GND on Bottom Layer "GND_BOTTOM" (solid, pour order 1): 0,78.74 1.51,63.38 5.99,48.61 13.27,34.99 23.06,23.06 34.99,13.27 48.61,5.99 63.38,1.51 78.74,0 4921.26,0 4936.62,1.51 4951.39,5.99 4965.01,13.27 4976.94,23.06 4986.73,34.99 4994.01,48.61 4998.49,63.38 5000,78.74 5000,921.26 4998.49,936.62 4994.01,951.39 4986.73,965.01 4976.94,976.94 4965.01,986.73 4951.39,994.01 4936.62,998.49 4921.26,1000 78.74,1000 63.38,998.49 48.61,994.01 34.99,986.73 23.06,976.94 13.27,965.01 5.99,951.39 1.51,936.62 0,921.26

## Silkscreen, mask and mechanical layers (free items; w line width, h text height)
Top Overlay:
  text "REV 1.0" at 4507.81,869.9 h25
  text "RACECAR SHIFTLIGHT" at 373.29,851.9 h40
  text "Designed by Lin Fu" at 370.29,759.15 h25
  text "Feb 2025" at 370.29,702.09 h25
  text "Hamilton, Ontario" at 370.29,650.81 h25